# Altium PCB Gobang.PcbDoc
Units mm, origin at the board's own origin, x right, y up, seen from the top; angles counter-clockwise.
Board outline 100.31 x 85.31 mm, 2 copper layers (Top Layer, Bottom Layer), stack 0.981 mm thick; 15 components, 23 nets, 129 pads, 9 vias.
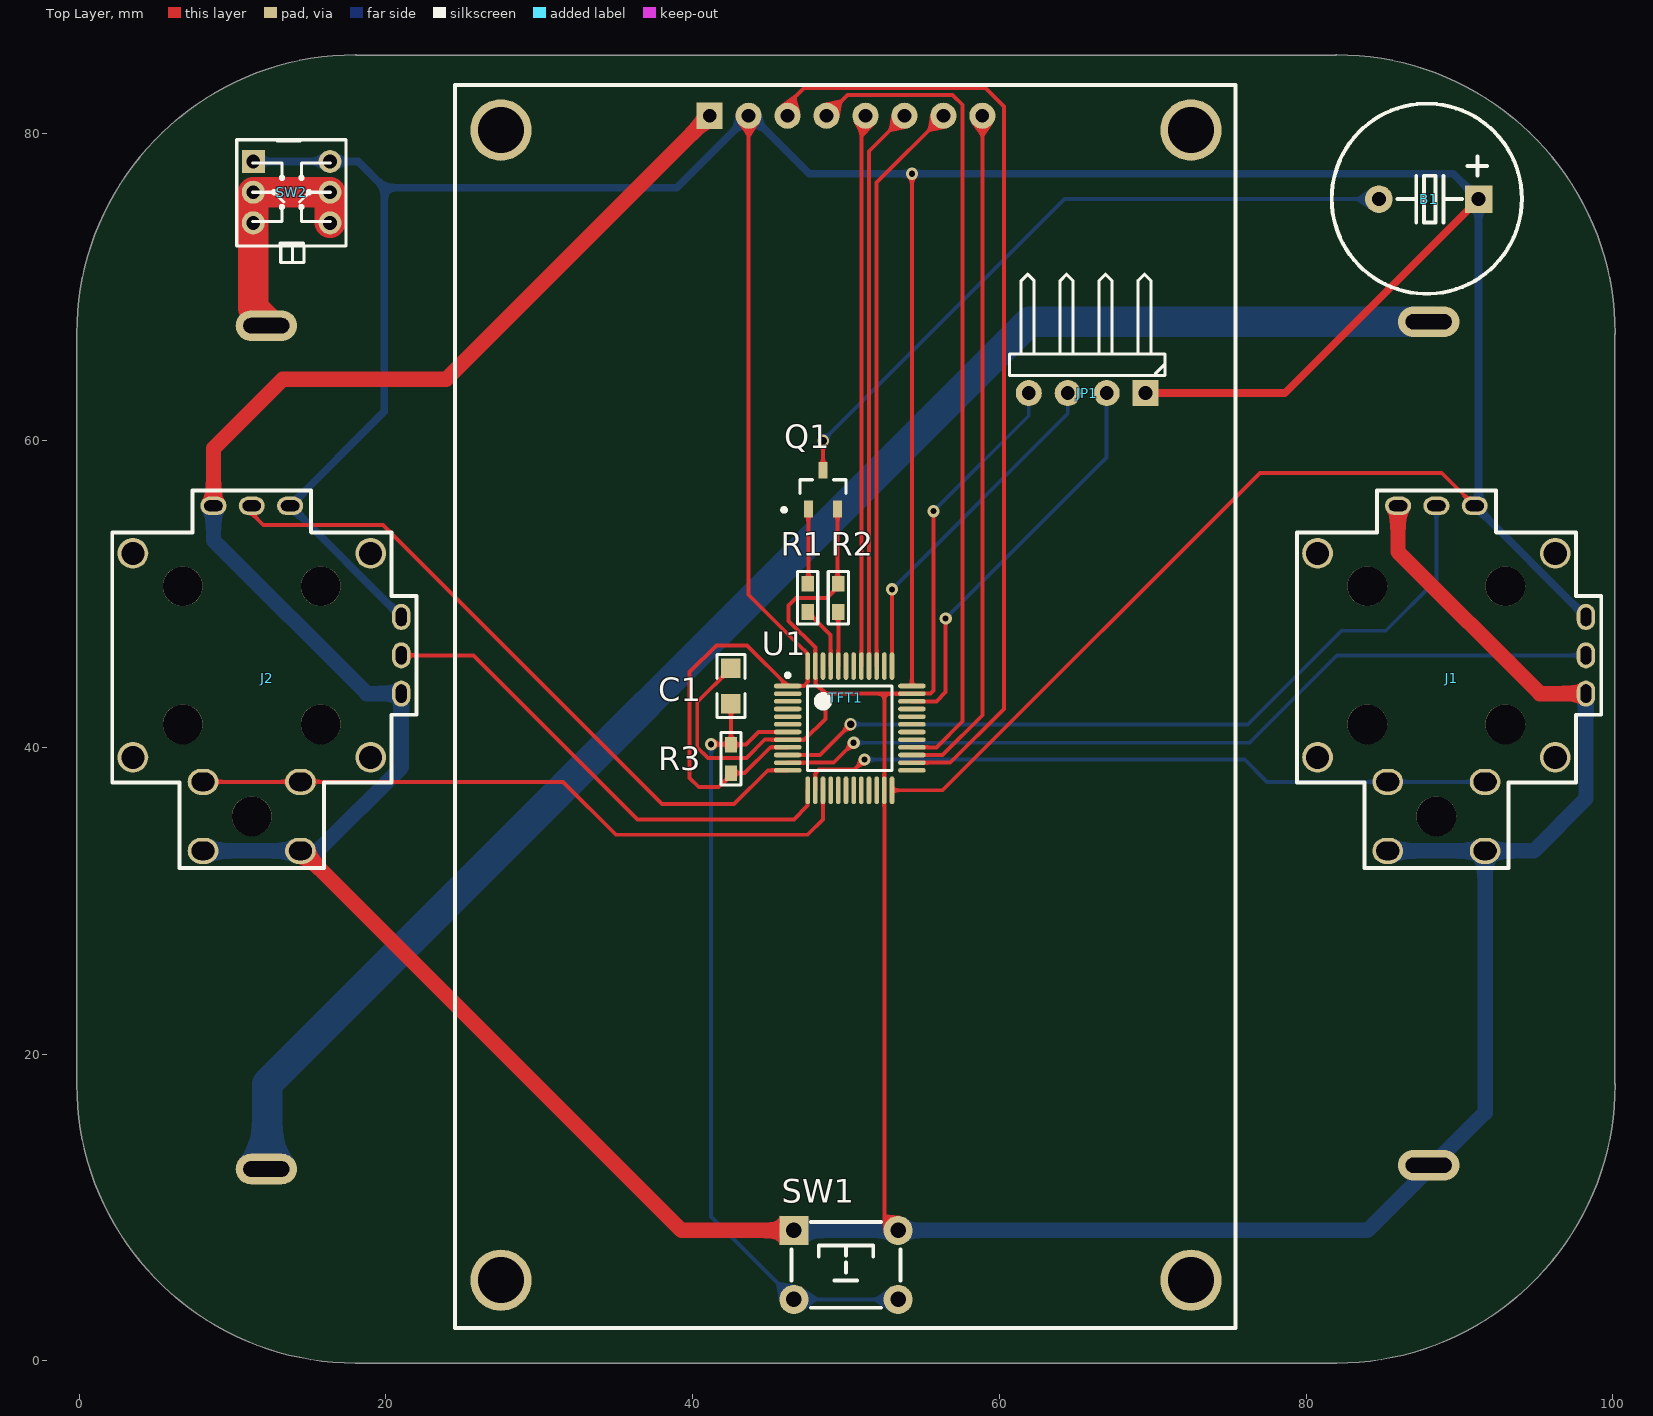
[diagram p0: Top Layer view]
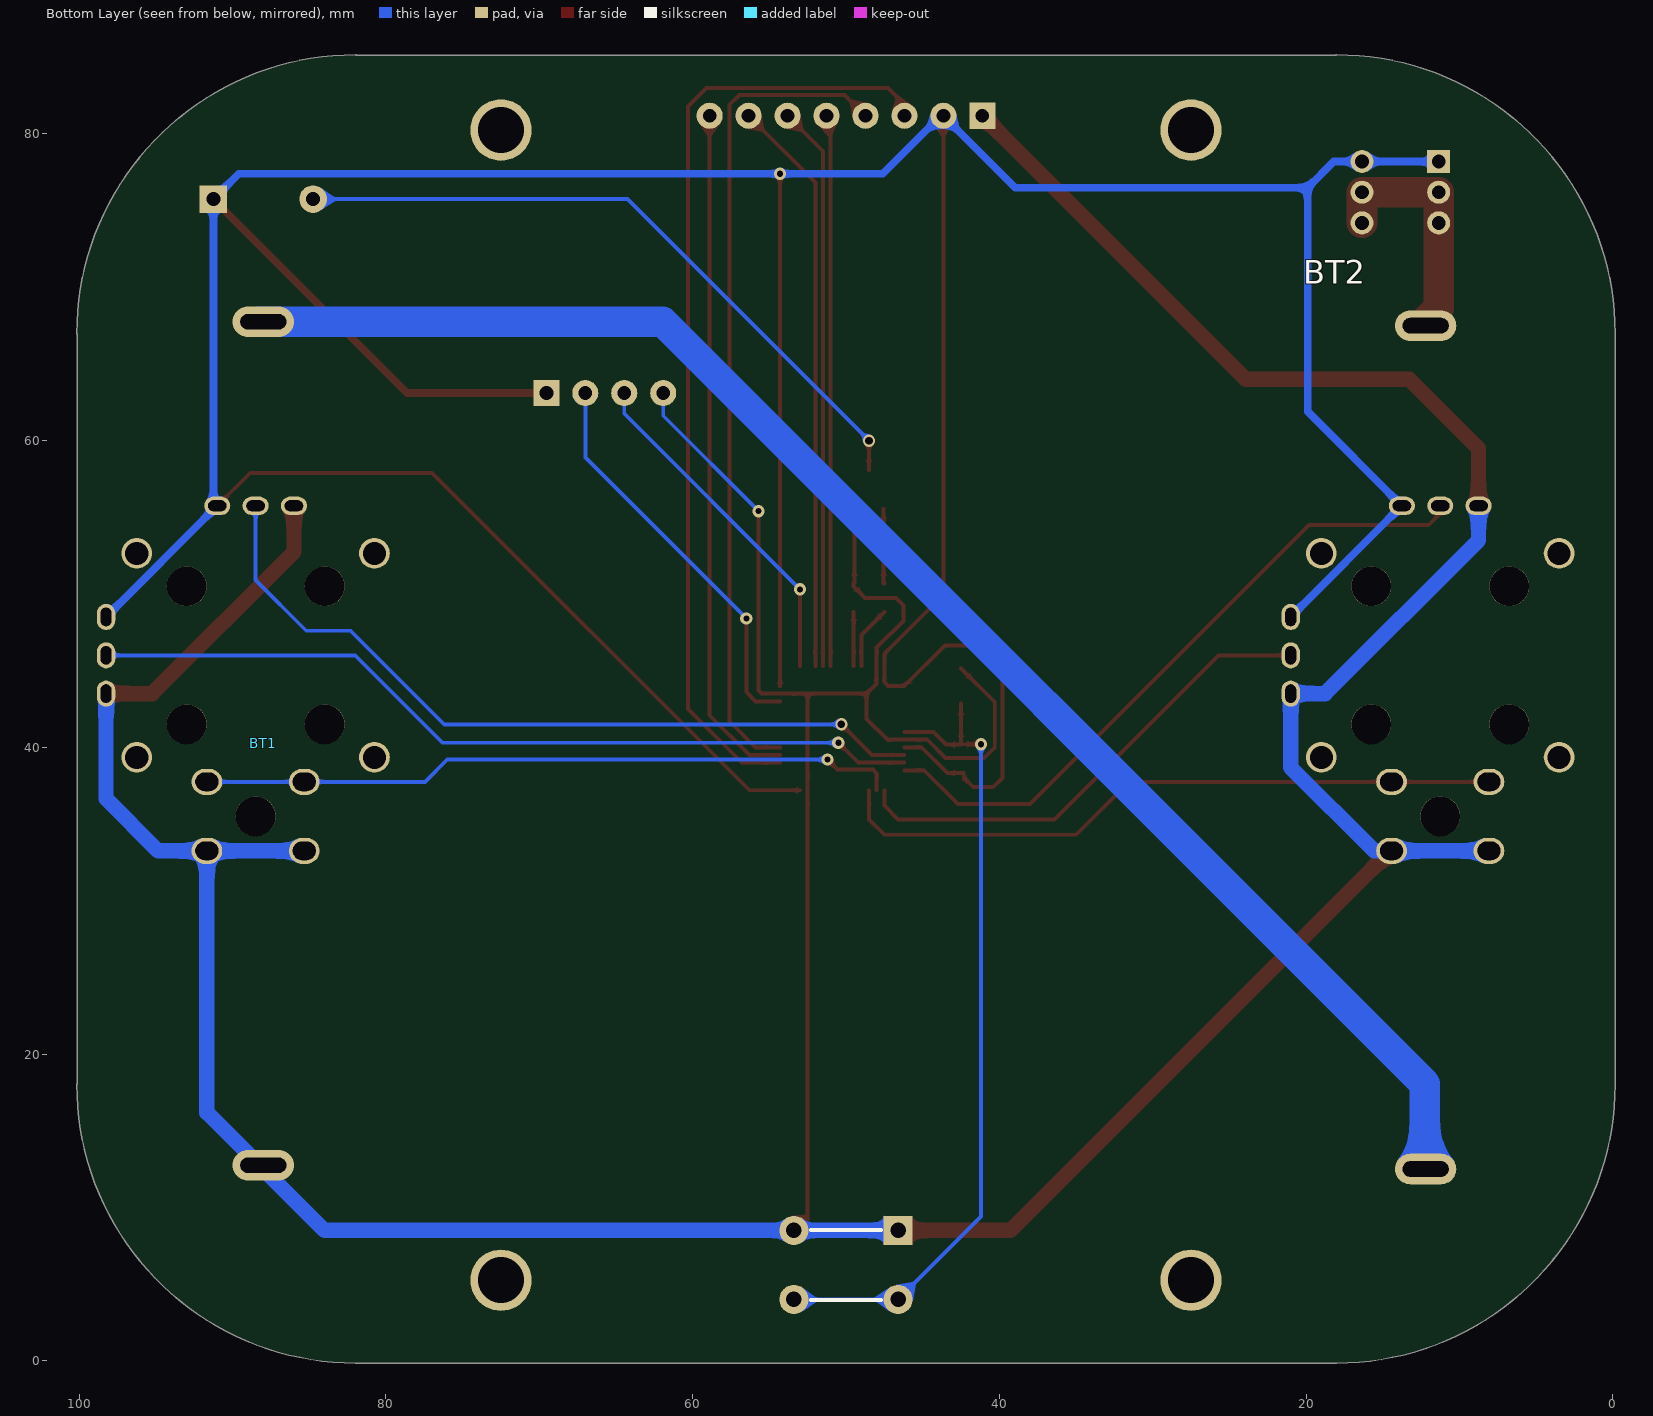
[diagram p1: Bottom Layer view, seen from below]

## Layer stack, top to bottom
Top Solder: solder mask 0.0102, Solder Resist, Dk 3.5
Top Layer: signal copper 0.0356
Dielectric 1: dielectric 0.91, FR-4, Dk 4.8
Bottom Layer: signal copper 0.0356
Bottom Solder: solder mask 0.0102, Solder Resist, Dk 3.5

## Board outline
18,-0.155 cw(c18,18) -0.155,18 -0.155,66.972 cw(c-0.028,66.972) -0.154,66.986 cw(c-0.028,67) -0.155,67 cw(c18,67) 18,85.155 cw(c18,85.028) 18.079,85.127 81.921,85.127 cw(c82,85.028) 82,85.155 cw(c82,67) 100.155,67 cw(c100.028,67) 100.127,66.921 100.127,18.079 cw(c100.028,18) 100.155,18 cw(c82,18) 82,-0.155 18.028,-0.155 cw(c18.028,-0.028) 18.014,-0.154 cw(c18,-0.028)

## Design rules (kind name [scope] priority, off if disabled: settings)
Clearance [All] p1: gap=0.2 ignorepadtopadclearanceinfootprint=TRUE
ComponentClearance [All] p1: gap=0.254 collisioncheckmode=3 verticalgap=0.254 showdistances=TRUE
Height [All] p1: minheight=0 maxheight=55.4 prefheight=12.7
HoleSize [All] p1: absolutevalues=TRUE maxlimit=5 minlimit=0.025 maxpercent=80.000 minpercent=20.000
PolygonConnect [All] p1: connectstyle=Relief reliefconductorwidth=0.254 reliefentries=4 polygonreliefangle="90 Angle" airgapwidth=0.254
RoutingVias [All] p1: holewidth=0.711 width=1.27 viastyle="Through Hole" minholewidth=0.3 minwidth=0.6 maxholewidth=0.711 maxwidth=1.27
SolderMaskExpansion [All] p1: expansion=0.102
Width [All] p1: maxlimit=5 minlimit=0.254 preferedwidth=0.254
27 further rules are at their usual default settings.

## Components (designator, comment, footprint, x,y, rotation, side; value= is the part's Value field where it differs from the comment)
B1 "DC3V" "BEEP 6.5x12x8.5" 88,75.75 r90 top
BT1 "Battery" "BATTERY AA X1" 88,40.25 r270 bottom
BT2 "Battery" "BATTERY AA X1" 12.2,40 r270 bottom
C1 "104" "C 0805" 42.5,44 r270 top
J1 "JOYSTICK-RJN10K" JOYSTICK-RJN10K 88.5,46 r0 top
J2 "JOYSTICK-RJN10K" JOYSTICK-RJN10K 11.25,46 r0 top
JP1 "HDR-1X4" HDR-1X4_H 69.54,63.1 r180 top
Q1 "S9013" SOT23-3N 48.5,56.75 r0 top
R1 "3K3" "R 0603" 47.5,49.75 r90 top
R2 "3K3" "R 0603" 49.5,49.75 r90 top
R3 "10K" "R 0603" 42.5,39.25 r270 top
SW1 "6x6x5" "TSW DIP-6*6*6" 50,6.25 r0 top
SW2 "KET 7X7" "KFT DIP-7X7" 13.85,76.2 r0 top
TFT1 "TFT2.8_8pin" TFT2.8_8PIN 50,80.65 r0 top
U1 "STM32F103C8T6" LQFP48_N 50.25,41.25 r0 top

## Footprints (in the part's own frame and the unit in brackets; to place one, negate y for a bottom-side part, rotate by r counter-clockwise, add the part's x,y. Pads: shape width x height; smd on the part's side, far side on the other; paste and mask are expansions set on the pad)
"BATTERY AA X1" [mm]
  oval 2x4 hole 3 slot 1 at 0 deg: 1(-27.5,0) 2(27.5,0)
  body extent -29.46,-8.25 29.46,8.26, height 22.62
"BEEP 6.5x12x8.5" [mm] "6.5*12*8.5mm(脚距,直径,高度)"
  rect 1.8x1.8 hole 0.9: A(0,-3.25)
  round 1.8 hole 0.9: K(0,3.25)
  silkscreen extent -6.17,-6.07 6.22,6.33, body extent -6,-7.58 6,6, height 8.55
"C 0805" [mil] "无极性贴片电容"
  rect 50x50 smd: 1(-45,0) 2(45,0)
  silkscreen extent -81,-36 81,36, body extent -39,-24 39,24, height 20
HDR-1X4_H [mm] "弯脚排针，4脚"
  rect 1.7x1.7 hole 0.9: 1(0,0)
  round 1.7 hole 0.9: 2(2.54,0) 3(5.08,0) 4(7.62,0)
  silkscreen extent -1.27,-7.76 8.89,-1.14, body extent -1.27,-7.77 8.89,1.27, height 4.85
JOYSTICK-RJN10K [mm]
  oval 1.7x1.2 hole 0.7 slot 1.2 at 0 deg: 1(-2.5,9.75) 2(0,9.75) 3(2.5,9.75)
  oval 1.2x1.7 hole 0.7 slot 1.2 at 90 deg: 4(9.75,2.5) 5(9.75,0) 6(9.75,-2.5)
  oval 2x1.7 hole 1.2 slot 1.5 at 0 deg: 7(-3.175,-8.25) 7(3.175,-8.25) 8(-3.175,-12.75) 8(3.175,-12.75)
  round 2 hole 1.5: ""(-7.75,-6.65) ""(-7.75,6.65) ""(7.75,-6.65) ""(7.75,6.65)
  round 2.6 hole 2.6: ""(-4.5,-4.5) ""(-4.5,4.5) ""(0,-10.5) ""(4.5,-4.5) ""(4.5,4.5)
  silkscreen extent -9.1,-13.87 10.75,10.75, body extent -13.27,-16.04 13.03,12.99, height 29.59
"KFT DIP-7X7" [mm] "自锁开关，规格：7*7mm"
  rect 1.5x1.5 hole 0.9: 1(-2.5,2)
  round 1.5 hole 0.9: 2(-2.5,0) 3(-2.5,-2) 4(2.5,-2) 5(2.5,0) 6(2.5,2)
  silkscreen extent -3.58,-4.58 3.56,3.42, body extent -3.5,-3.5 3.5,3.5, height 11.2
LQFP48_N [mm] "Thin QFP, 48-Leads, Body 7x7mm, Pitch 0.5mm, IPC Medium Density"
  oval 1.8x0.3 smd: 1(-4.05,2.75) 2(-4.05,2.25) 3(-4.05,1.75) 4(-4.05,1.25) 5(-4.05,0.75) 6(-4.05,0.25) 7(-4.05,-0.25) 8(-4.05,-0.75) 9(-4.05,-1.25) 10(-4.05,-1.75) 11(-4.05,-2.25) 12(-4.05,-2.75) 25(4.05,-2.75) 26(4.05,-2.25) 27(4.05,-1.75) 28(4.05,-1.25) 29(4.05,-0.75) 30(4.05,-0.25) 31(4.05,0.25) 32(4.05,0.75) 33(4.05,1.25) 34(4.05,1.75) 35(4.05,2.25) 36(4.05,2.75)
  oval 0.3x1.8 smd: 13(-2.75,-4.05) 14(-2.25,-4.05) 15(-1.75,-4.05) 16(-1.25,-4.05) 17(-0.75,-4.05) 18(-0.25,-4.05) 19(0.25,-4.05) 20(0.75,-4.05) 21(1.25,-4.05) 22(1.75,-4.05) 23(2.25,-4.05) 24(2.75,-4.05) 37(2.75,4.05) 38(2.25,4.05) 39(1.75,4.05) 40(1.25,4.05) 41(0.75,4.05) 42(0.25,4.05) 43(-0.25,4.05) 44(-0.75,4.05) 45(-1.25,4.05) 46(-1.75,4.05) 47(-2.25,4.05) 48(-2.75,4.05)
  silkscreen extent -4.17,-2.75 2.75,3.57, body extent -3.5,-3.5 3.5,3.5, height 1.6
"R 0603" [mil] "1/10W贴片电阻"
  rect 40x31.5 smd: 1(-36.5,0) 2(36.5,0)
  silkscreen extent -67,-26 68,26, body extent -31,-16 32,16, height 16
SOT23-3N [mm] "SOT23, 3-Leads, Body 2.9x1.3mm, Pitch 0.95mm, Lead Span 2.3mm - Reverse Pinning, IPC Medium Density"
  rect 0.6x1.1 smd: 1(-0.951,-1.199) 2(0.949,-1.199) 3(0,1.32)
  silkscreen extent -2.66,-1.39 1.5,0.7, body extent -1.5,-1.32 1.5,1.32, height 1.08
TFT2.8_8PIN [mm]
  rect 1.7x1.7 hole 0.9: 1(-8.89,0.533)
  round 1.7 hole 0.9: 2(-6.35,0.533) 3(-3.81,0.533) 4(-1.27,0.533) 5(1.27,0.533) 6(3.81,0.533) 7(6.35,0.533) 8(8.89,0.533)
  round 4 hole 3: ""(-22.502,-75.4) ""(-22.502,-0.4) ""(22.498,-75.4) ""(22.498,-0.4)
  silkscreen extent -25.5,-78.51 25.4,2.54, body extent -25.5,-78.4 25.5,2.6, height 10.6
"TSW DIP-6*6*6" [mm] "6*6*6mm"
  rect 1.9x1.9 hole 1: 1(-3.4,2.25)
  round 1.9 hole 1: 2(-3.4,-2.25) 3(3.4,-2.25) 4(3.4,2.25)
  silkscreen extent -3.56,-2.79 3.56,2.79, body extent -4.11,-3 4.11,3, height 5.95

## Part data
B1: library part BEEP, "蜂鸣器"
BT1 BT2: "Multicell Battery", LatestRevisionDate=17-Jul-2002, LatestRevisionNote="Re-released for DXP Platform.", PackageReference=BAT-2, Published=24-Mar-1999, Publisher="Altium Limited"
C1: library part C, "无极性贴片电容"
JP1: library part "Header 4", "4P接插件", BOM名称=4P接插件, 学习资源=www.ooocke.com, 版权归属=源创客
Q1: library part 9013-SMD, "低频放大-NPN型", BOM名称=低频放大-NPN型, 学习资源=www.ooocke.com, 属性=50V?0.5A?0.625W, 版权归属=源创客
R1 R2 R3: library part R, "贴片电阻"
SW1: library part "TSW DIP-6x6", "直插6x6轻触开关", BOM名称=直插6x6轻触开关, 学习资源=www.ooocke.com, 版权归属=源创客
SW2: "7*7自锁开关"
TFT1: "240*320"
U1: "STM32 ARM-based 32-bit MCU Performance Line with 64 kB Flash, 20 kB Internal RAM, -40 to +85癈 Temperature, 48-Pin LQFP, Tray", ComponentLink1Description="Manufacturer URL", ComponentLink1URL=http://www.st.com/, ComponentLink2Description="STM32F103 Datasheet", ComponentLink2URL=http://www.st.com/internet/com/TECHNICAL_RESOURCES/TECHNICAL_LITERATURE/DATASHEET/CD00161566.pdf, ComponentLink3Description="STM32 Family Web Page", ComponentLink3URL=www.st.com/stm32, DatasheetVersion="rev13.0, Apr-2011", PackageDescription="48-Pin Low-Profile Quad Flat Pack, 7 x 7 mm Body, 0.5 mm Pitch (LQFP48)", PackageReference=LQFP48, PackageVersion="rev13, Apr-2011"

## Via types
v1: diameter 0.8, hole 0.4, Top Layer to Bottom Layer, 7 vias
v2: diameter 0.8, hole 0.5, Top Layer to Bottom Layer, 2 vias

## Nets (pads, with @x,y where several pads share a name; then routed paths per layer and width w, separated by ;. In a path a pad name is that pad's centre, name@x,y a point inside that pad or via, vN(x,y) a via of type N, cw(c..) or ccw(c..) an arc to the next point about the centre after c; other vN are vias at no path point)
BAT: BT2.1 SW2.2 SW2.3 SW2.4 SW2.5 | length 15.8
  Top Layer w2: BT2.1@12.25,67.75 11.35,68.65 SW2.3 SW2.2 SW2.5 SW2.4
Buzzer: R1.1 U1.45 | length 4.1
  Top Layer w0.254: R1.1 49,47.323 U1.45
GND: BT1.2 C1.1 J1.1 J1.6 J1.8 J2.1 J2.6 J2.8 JP1.4 Q1.2 R2.2 SW1.1 SW1.4 TFT1.1 U1.8 U1.23 U1.35 U1.47 | length 329.2
  Top Layer w0.254: J2.8@14.425,33.25 J2.8@14.475,33.3 ; C1.1 40.3,42.943 40.3,40 41,39.3 43.5,39.3 44.7,40.5 U1.8 47.3,40.5 48.658,41.858 48.658,43.5 ; Q1.2 49.449,50.728 R2.2 49.5,50.5 48.75,49.75 46.75,49.75 46.25,49.25 46.25,48.25 48,46.5 U1.47 48.023,45.277 48.023,44.135 48.658,43.5 ; SW1.4 52.5,9.4 U1.23 52.5,43.5 ; v1(55.7,55.4) 55.7,43.7 55.5,43.5 U1.35 52.5,43.5 ; 48.658,43.5 52.5,43.5
  Top Layer w1: J2.1 8.75,59.5 13.25,64 23.928,64 TFT1.1@41.112,81.183 ; J2.8@14.475,33.3 39.275,8.5 SW1.1 ; J1.1 86,52.75 95.25,43.5 J1.6
  Bottom Layer w0.254: v1(55.7,55.4) 61.92,61.62 JP1.4
  Bottom Layer w1: J2.8@8.075,33.25 14.425,33.25 15.55,33.25 21,38.7 J2.6 18.75,43.5 8.75,53.5 J2.1 ; SW1.1 SW1.4 84,8.5 91.675,16.175 J1.8@91.675,33.25 ; J1.8@85.325,33.25 J1.8@91.675,33.25 ; J1.6 98.25,36.65 94.85,33.25 J1.8@91.675,33.25
K1: J1.7 U1.14 | length 45.7
  Top Layer w0.254: U1.14 48,38.3 48.246,38.546 50.546,38.546 v1(51.2,39.2)
  Bottom Layer w0.254: v1(51.2,39.2) 76,39.2 77.45,37.75 85.325,37.75 J1.7@91.675,37.75
K2: J2.7 U1.15 | length 44.2
  Top Layer w0.254: J2.7@8.075,37.75 14.425,37.75 31.55,37.75 35,34.3 47.5,34.3 48.5,35.3 U1.15
LCD_BLK: TFT1.7 U1.39 | length 37.7
  Top Layer w0.254: U1.39 52,76.832 TFT1.7@56.352,81.183
LCD_CLK: TFT1.3 U1.26 | length 62.6
  Top Layer w0.254: TFT1.3@46.192,81.183 46.192,81.942 47.25,83 59.1,83 60.3,81.8 60.3,42.5 56.8,39 U1.26
LCD_DC: TFT1.6 U1.40 | length 36.8
  Top Layer w0.254: U1.40 51.5,78.872 TFT1.6@53.812,81.183
LCD_MISO: TFT1.8 U1.27 | length 44.8
  Top Layer w0.254: U1.27 56.3,39.5 58.892,42.092 TFT1.8@58.892,81.183
LCD_MOSI: TFT1.4 U1.28 | length 53.9
  Top Layer w0.254: TFT1.4@48.732,81.183 50.094,82.546 56.954,82.546 57.6,81.9 57.6,80 57.6,41.7 55.9,40 U1.28
LCD_RES: TFT1.5 U1.41 | length 36
  Top Layer w0.254: U1.41 51.009,45.309 51.009,80.921 TFT1.5@51.272,81.183
NetB1_K: B1.K Q1.3 | length 44.7
  Top Layer w0.254: Q1.3 v2(48.5,60)
  Bottom Layer w0.254: v2(48.5,60) 64.25,75.75 B1.K
NetBT1_1: BT1.1 BT2.2 | length 101.9
  Bottom Layer w2: BT2.2@12.25,12.75 12.25,18.05 61.95,67.75 BT1.1@88.25,67.75
NetC1_2: C1.2 R3.1 SW1.2 SW1.3 U1.7 | length 53.3
  Top Layer w0.254: v1(41.2,40.2) 42.477,40.2 R3.1 ; C1.2 R3.1 ; U1.7 44.3,41 43.477,40.177 R3.1
  Bottom Layer w0.254: v1(41.2,40.2) 41.2,9.4 SW1.2 SW1.3
NetQ1_1: Q1.1 R1.2 | length 4.9
  Top Layer w0.254: R1.2 47.549,50.726 Q1.1
NetR2_1: R2.1 U1.44 | length 3.5
  Top Layer w0.254: U1.44 R2.1
SWCLK: JP1.3 U1.37 | length 22.5
  Top Layer w0.254: U1.37 v1(53,50.3)
  Bottom Layer w0.254: v1(53,50.3) 64.46,61.76 JP1.3
SWDIO: JP1.2 U1.34 | length 26.3
  Top Layer w0.254: U1.34 55.9,43 56.5,43.6 v1(56.5,48.4)
  Bottom Layer w0.254: v1(56.5,48.4) 67,58.9 JP1.2
VCC: B1.A J1.3 J1.4 J2.3 J2.4 JP1.1 R3.2 SW2.1 SW2.6 TFT1.2 U1.1 U1.9 U1.24 U1.36 U1.48 | length 319.5
  Top Layer w0.254: TFT1.2@43.652,81.183 43.652,49.948 47.5,46.1 U1.48 47.5,44.25 47.25,44 U1.1 43.55,46.65 41.55,46.65 39.8,44.9 39.8,38 40.4,37.4 41.7,37.4 42.323,38.023 42.323,38.323 R3.2 43.381,38.323 45.058,40 U1.9 ; U1.24 56.3,37.2 77,57.9 88.85,57.9 J1.3 ; U1.36 v1(54.3,77.4)
  Top Layer w0.5: JP1.1 78.6,63.1 B1.A
  Bottom Layer w0.254: TFT1.2@43.652,81.183 TFT1.2@43.817,81.183
  Bottom Layer w0.5: SW2.1 SW2.6 18.2,78.2 19.9,76.5 ; J2.4 J2.3 19.9,61.9 19.9,76.5 ; TFT1.2@43.652,81.183 38.968,76.5 19.9,76.5 ; TFT1.2@43.817,81.183 47.6,77.4 v1(54.3,77.4) 89.6,77.4 B1.A 91.25,56 J1.3 J1.4
XA1: J1.2 U1.10 | length 51.9
  Top Layer w0.254: U1.10 48.3,39.5 v2(50.3,41.5)
  Bottom Layer w0.254: v2(50.3,41.5) 76.2,41.5 82.3,47.6 85.2,47.6 88.5,50.9 J1.2
XA2: J2.2 U1.12 | length 44.2
  Top Layer w0.254: J2.2 11.25,55.25 12,54.5 19.8,54.5 38,36.3 42.7,36.3 44.9,38.5 U1.12
YA1: J1.5 U1.11 | length 54.9
  Top Layer w0.254: U1.11 49.2,39 v1(50.5,40.3)
  Bottom Layer w0.254: v1(50.5,40.3) 76.3,40.3 82,46 J1.5
YA2: J2.5 U1.13 | length 32.3
  Top Layer w0.254: J2.5 25.7,46 36.4,35.3 46.6,35.3 47.5,36.2 U1.13
pads on no net: J1. J2. TFT1. U1.2 U1.3 U1.4 U1.5 U1.6 U1.16 U1.17 U1.18 U1.19 U1.20 U1.21 U1.22 U1.25 U1.29 U1.30 U1.31 U1.32 U1.33 U1.38 U1.42 U1.43 U1.46

## Silkscreen, mask and mechanical layers (free items; w line width, h text height)
Mechanical 1:
  lines w0.254: -0.028,67 cw(c18,67) 18,85.028 ; 0,67 -0.028,66.972 -0.028,18 ccw(c18,18) 18,-0.028 ; 18,0 18.028,-0.028 82,-0.028 ccw(c82,18) 100.028,18 ; 18,85 81.972,85 82,85.028 cw(c82,67) 100.028,67 ; 100,18 100,67